# EAGLE board klon (EAGLE 9.6.2)
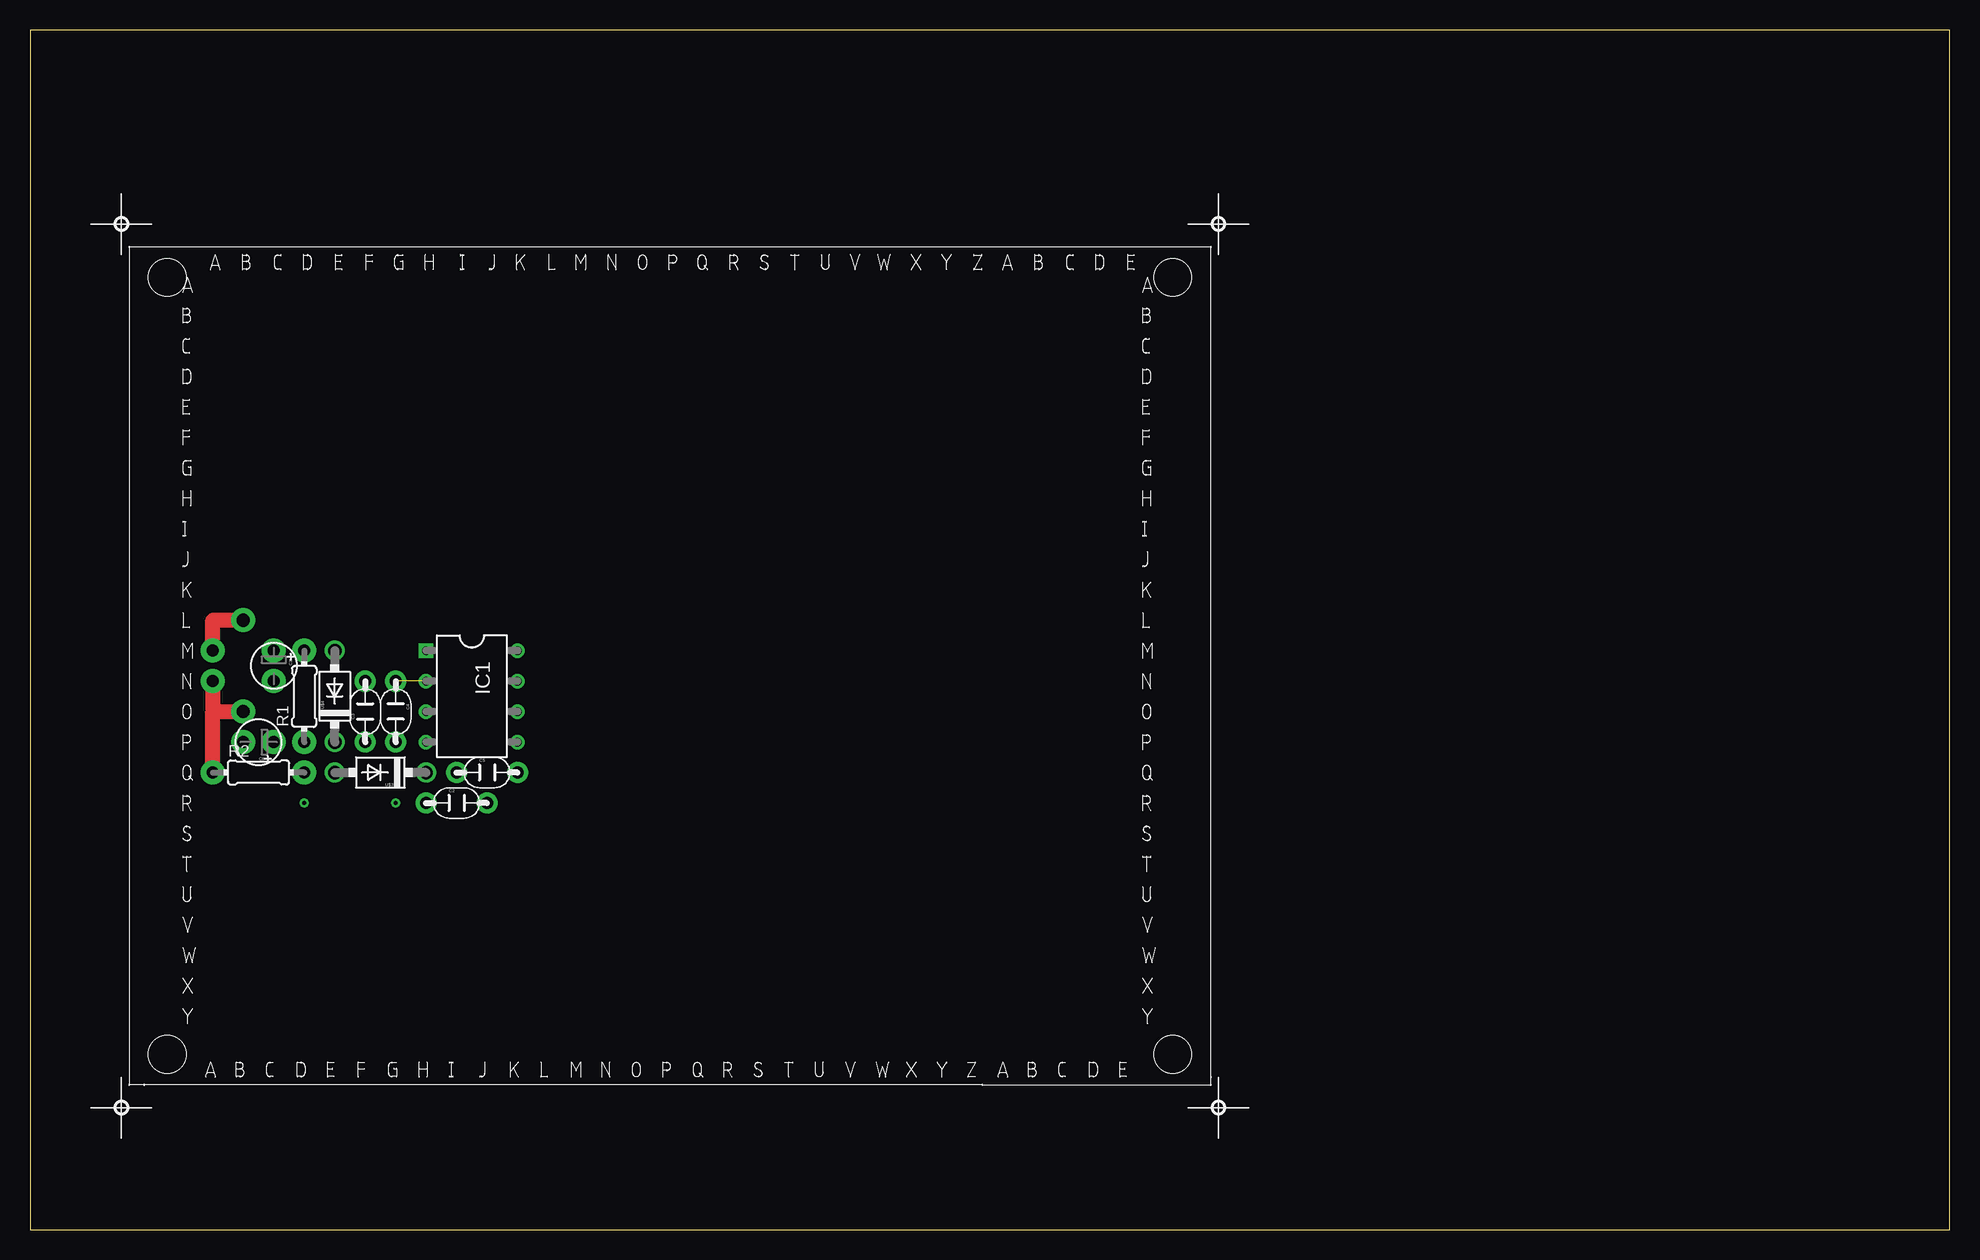
[diagram p0: board, top side]
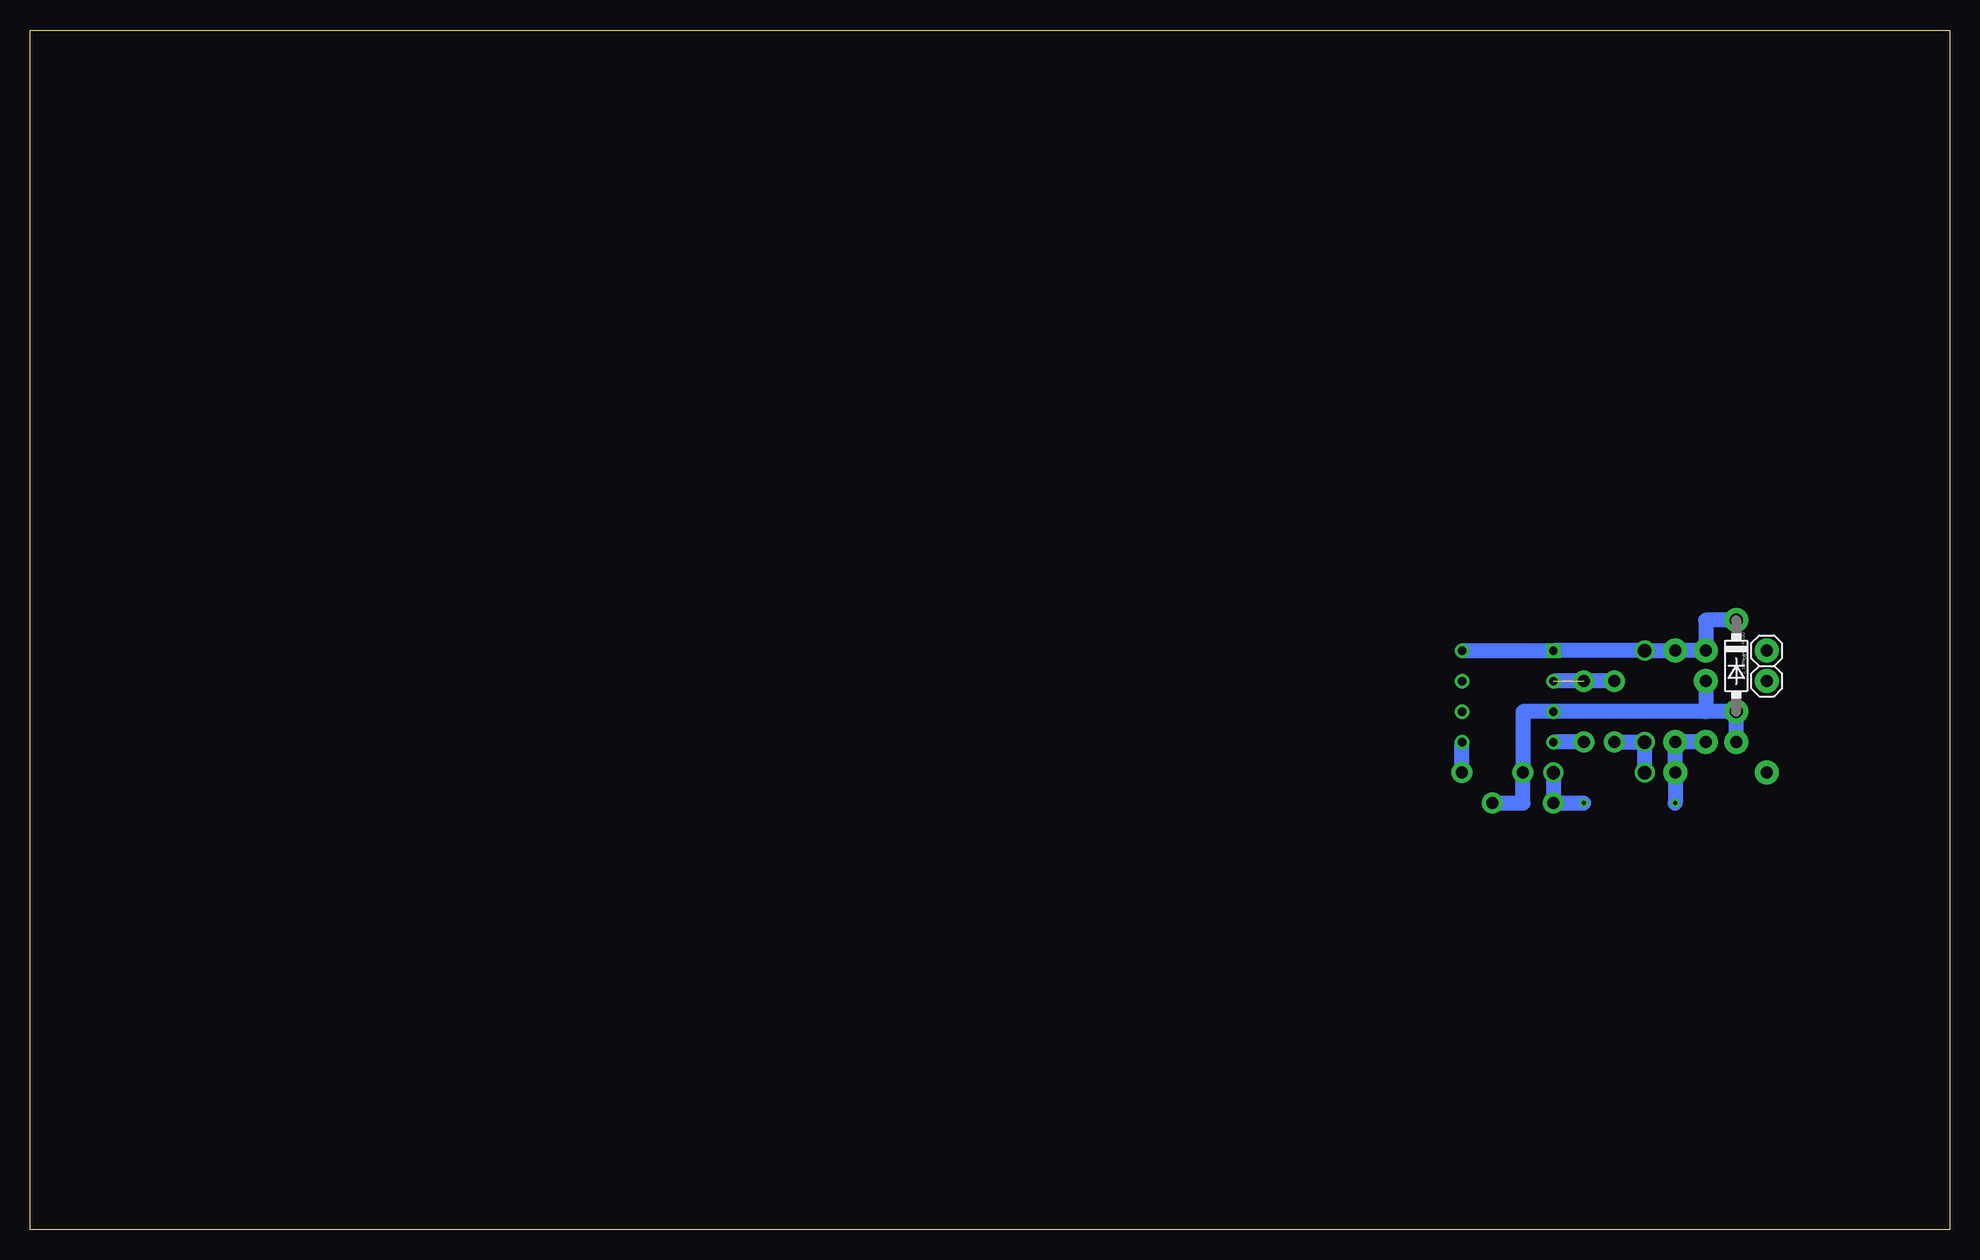
[diagram p1: board, bottom side, seen from below]

Size 160 x 100 mm. Coordinates in mm from the lower left corner, seen from the top.
Outline: 0,0 160,0 160,100 0,100 0,0
Copper layers (1*16): Top 0.035mm / dielectric 1.5mm / Bottom 0.035mm
Design rules "default": minimum track width 6mil, minimum drill 0.35mm, track to track 6mil, track to pad 6mil, pad to pad 6mil, via to via 6mil, smd to smd 6mil, copper to edge 40mil, drill to drill 6mil, minimum pad ring 10mil, minimum via ring 8mil, stop-mask expansion 4mil, vias tented up to drill 0mil, thermal gap 10mil

## Footprints (pad centres in the part's own frame; a part is rotated, then mirrored left to right if it is on the bottom)
C-E-0.1_0.15 = drill 1.016 pad 2: + -1.27,0; - 1.27,0
C-MM-0.2_0.1 = drill 1.016 pad 1.778: 1 -2.54,0; 2 2.54,0
DO41-7.6 = drill 1.1 pad 2: A 3.81,0; C -3.81,0
DIL08 = drill 0.7 square: 1 -3.81,-3.81 | drill 0.7: 2 -1.27,-3.81; 3 1.27,-3.81; 4 3.81,-3.81; 5 3.81,3.81; 6 1.27,3.81; 7 -1.27,3.81; 8 -3.81,3.81
0204/7 = drill 1.016 pad 2: 1 -2.54,0; 2 5.08,0
1X02 = drill 1.016 pad 2: 1 -1.27,0; 2 1.27,0
DO41-7 = drill 1.118: A 3.81,0; C -3.81,0

## Placement (x,y rotation side)
C1  47u  [C-E-0.1_0.15]  20.32,46.99 270 top
C2  1u  [C-MM-0.2_0.1]  35.56,35.56 0 top
C3  1u  [C-MM-0.2_0.1]  27.94,43.18 90 top
C4  1u  [C-MM-0.2_0.1]  30.48,43.18 270 top
C5  1u  [C-MM-0.2_0.1]  38.1,38.1 0 top
C6  47u  [C-E-0.1_0.15]  19.05,40.64 180 top
D1  1N4742  [DO41-7.6]  17.78,46.99 270 bottom
IC1  MAX1044  [DIL08]  36.83,44.45 270 top
R1  27k  [0204/7]  22.86,43.18 90 top
R2  27k  [0204/7]  17.78,38.1 0 top
U$1  [9X7_CM]  5.08,7.62 0 top
U$2  2_1MM-JACK-PLUG  [1X02]  15.24,46.99 90 bottom
U$3  1N4001  [DO41-7]  29.21,38.1 180 top
U$4  1N4001  [DO41-7]  25.4,44.45 90 top

## Library data of the parts
C1 C6 U$2-U$4 = pedal-library
C2-C5 = pedal-library; SPICEPREFIX: C
D1 = pedal-library; AVAILABILITY: Warning; DESCRIPTION: Zener Diode 12V 1W ±5% Through Hole DO-41; MF: EIC Semiconductor; MP: 1N4742; PACKAGE: DO-41 EIC Semiconductor; PRICE: None
IC1 = MAX1044; AVAILABILITY: Unavailable; DESCRIPTION: Charge Pump Switching Regulator IC Positive or Negative Fixed -Vin, nVin, Vin/2 1 Output 20mA 8-SOIC (0.154, 3.90mm Width); MF: Maxim Integrated; MP: MAX1044; PACKAGE: DIP-8 Maxim Integrated; PRICE: None
R1 R2 = pedal-library; SPICEPREFIX: R
U$1 = perfboards; DEPTH: 1.6mm; HEIGHT: 7cm; HOLE_DIA: 3.7mm; PITCH: 0.1in; SIDES: 2; WIDTH: 9cm

## Nets
+4.5V: C6.+ R1.1 R2.2
+9V: C1.+ D1.C IC1.1 IC1.8 R1.2 U$2.2 U$4.A
+16.2V: C2.1 U$3.C
GND: C1.- C2.2 C5.1 C6.- D1.A IC1.3 R2.1 U$2.1
N$2: C5.2 IC1.5
N$3: C3.1 U$3.A U$4.C
N$5: C4.2 IC1.4
N$6: C3.2 C4.1 IC1.2

## Tracks (layer width: path | path; a pad name or v marks a point on that pad's centre or on a via)
+4.5V  (via drill 0.35)
  Bottom 1.27: C6.+ R1.1 R2.2 v22.86,35.56
+9V
  Top 1.27: U$2.2 15.24,50.8 D1.C
  Bottom 1.27: IC1.8 IC1.1 U$4.A R1.2 C1.+ 20.32,50.8 D1.C
+16.2V  (via drill 0.35)
  Bottom 1.27: U$3.C C2.1 v30.48,35.56
GND
  Top 1.27: U$2.1 15.24,43.18 | 15.24,43.18 D1.A | R2.1 15.24,43.18
  Bottom 1.27: C6.- D1.A 20.32,43.18 | C1.- 20.32,43.18 | 20.32,43.18 IC1.3 35.56,43.18 C5.1 35.56,35.56 C2.2
N$2
  Bottom 1.27: C5.2 IC1.5
N$3
  Bottom 1.27: U$3.A U$4.C C3.1
N$5
  Bottom 1.27: C4.2 IC1.4
N$6  (1 unrouted)
  Bottom 1.27: C3.2 IC1.2